# Altium PCB PCB1.PcbDoc (part 2 of 2)
Units mil, origin at the board's own origin, x right, y up, seen from the top; angles counter-clockwise.
Board outline 2200 x 3595 mil, 2 copper layers (Top Layer, Bottom Layer), stack 1.929 mil thick; 92 components, 67 nets, 296 pads, 85 vias.
Unrouted connection lines stored in the file: 1.
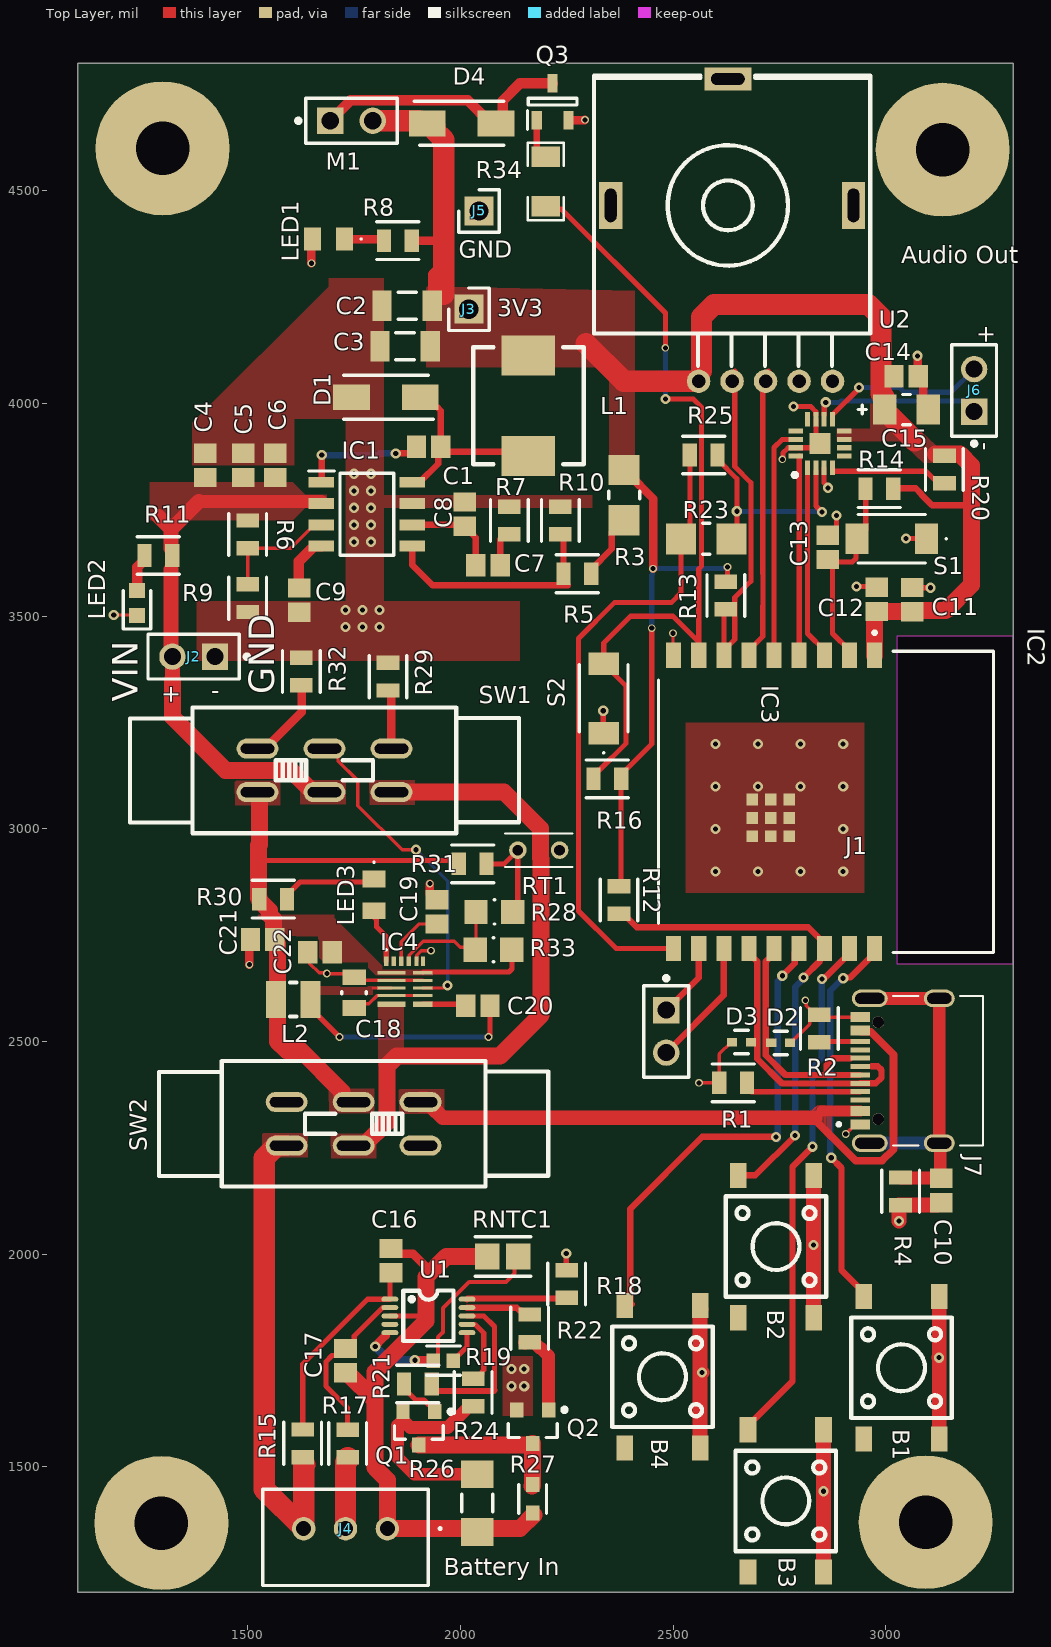
[diagram p0: Top Layer view]

## Polygon pours and split planes (outlines as drawn) (continued)
+5_Charging on Top Layer "+5_CHARGING_L01_P029" (solid, pour order 29): 1470,3113 1577,3113 1577,3056 1471,3056
+5_preswitch on Top Layer "+5_PRESWITCH_L01_P028" (solid, pour order 28): 1855,2388 1962,2388 1962,2331 1856,2331
+5_Charging on Top Layer "+5_CHARGING_L01_P027" (solid, pour order 27): 1691,2389 1798,2389 1798,2332 1692,2332
Bat+ on Top Layer "BAT+_L01_P026" (solid, pour order 26): 1695,2283 1802,2283 1802,2226 1696,2226
Bat+_Preswitch on Top Layer "BAT+_PRESWITCH_L01_P025" (solid, pour order 25): 1534,2285 1641,2285 1641,2228 1535,2228
+5_preswitch on Top Layer "+5_PRESWITCH_L01_P022" (solid, pour order 22): 2824,2334 2839,2349 2857,2349 2857,2287 2856,2286
+5_preswitch on Top Layer "+5_PRESWITCH_L01_P023" (solid, pour order 23): 2873,2263.6 2873,2349 2839,2349 2814.47,2324.47
GND on Top Layer "GND_L01_P003" (solid, pour order 3): 1370,3855 1610,3855 1610,3965 1820,3965 1820,4295 1690,4295 1690,4275 1370,3955
+3V3 on Top Layer "+3V3_L01_P018" (solid, pour order 18): 2963,4005 2964,3940 2997.68,3911 3053.46,3911
+3V3 on Top Layer "+3V3_L01_P019" (solid, pour order 19): 3088.61,3861 3161.3,3861 3081,3936 3008.17,3936
GND on Top Layer "GND_L01_P021" (solid, pour order 21): 2530,3250 2530,2850 2950,2850 2950,3250
+3V3 on Top Layer "+3V3_L01_P016" (solid, pour order 16): 2885,3911 2885,3941 3003,3941 2999,3937 2999,3911
+5_Charging on Top Layer "+5_CHARGING_L01_P007" (solid, pour order 7): 1519,2798 1703,2798 1703,2791 1816,2678 1816,2669 1935,2669 1935,2656 1802,2656 1801.5,2655.5 1783,2674 1783,2687 1679,2687 1666,2700 1666,2747 1561,2749 1551,2774
NetC20_2 on Top Layer "NetC45_2" (solid, pour order 0): 1640,2630 1793.99,2630 1793.99,2610 1640,2610
Bat+ on Top Layer "BAT+_L01_P015" (solid, pour order 15): 1806,2590 1807,2591 1867,2591 1867,2473 1836.28,2442.28 1807,2442.28 1807,2589 1804,2592
GND on Top Layer "GND_L01_P005" (solid, pour order 5): 1815,3785 1815,3755 2310,3755 2310,3785
+3V3 on Top Layer "+3V3_L01_P006" (solid, pour order 6): 1920,4275.43 1920,4085 2330,4085 2350,4065 2350,3835 2410,3835 2410,4265
Vin_Buck on Top Layer "VIN_BUCK_L01_P002" (solid, pour order 2): 1270,3815.52 1605.75,3815.52 1635.75,3785.52 1685.75,3785.52 1685.75,3755.52 1635.75,3755.52 1605.75,3725.52 1375.75,3725.52 1270,3725.52
GND on Top Layer "GND_L01_P004" (solid, pour order 4): 1730,3975 1730,3525 1820,3525 1820,3975
GND on Top Layer "GND_L01_P001" (solid, pour order 1): 1380,3535 2140,3535 2140,3395 1380,3395
GND on Top Layer "GND_L01_P008" (solid, pour order 8): 2100,1620 2170,1620 2170,1760 2100,1760
GND on Bottom Layer "GND_L02_P020" (hatched 45Degree grid 20 track 8, pour order 20): 1100,4800 1100,1205 3300,1205 3300,4800

## Silkscreen, mask and mechanical layers (free items; w line width, h text height)
Board Layer Stack Top Overlay:
  text "+" at 3219.24,4185.09 h40 r270
  text "-" at 3215.91,3909.09 h40 r270
  text "+" at 1302.24,3339.09 h40 r270
  text "GND" at 1562,3317 h60 r90
  text "-" at 1413.91,3305.91 h40
  text "VIN" at 1242,3299 h60 r90

## Text inside footprints (layer, text, board x,y; h text height)
J1: Mechanical 13 "PCB EDGE" at 3214.61,2648.01 h32 r90